# Altium PCB DAL_DPU.PcbDoc (part 3 of 3)
Units mm, origin at the board's own origin, x right, y up, seen from the top; angles counter-clockwise.
Board outline 93 x 90 mm, 4 copper layers (L1_TOP, L2_GND, L3_POWER, L4_BOT), stack 1.584 mm thick; 234 components, 146 nets, 788 pads, 889 vias.
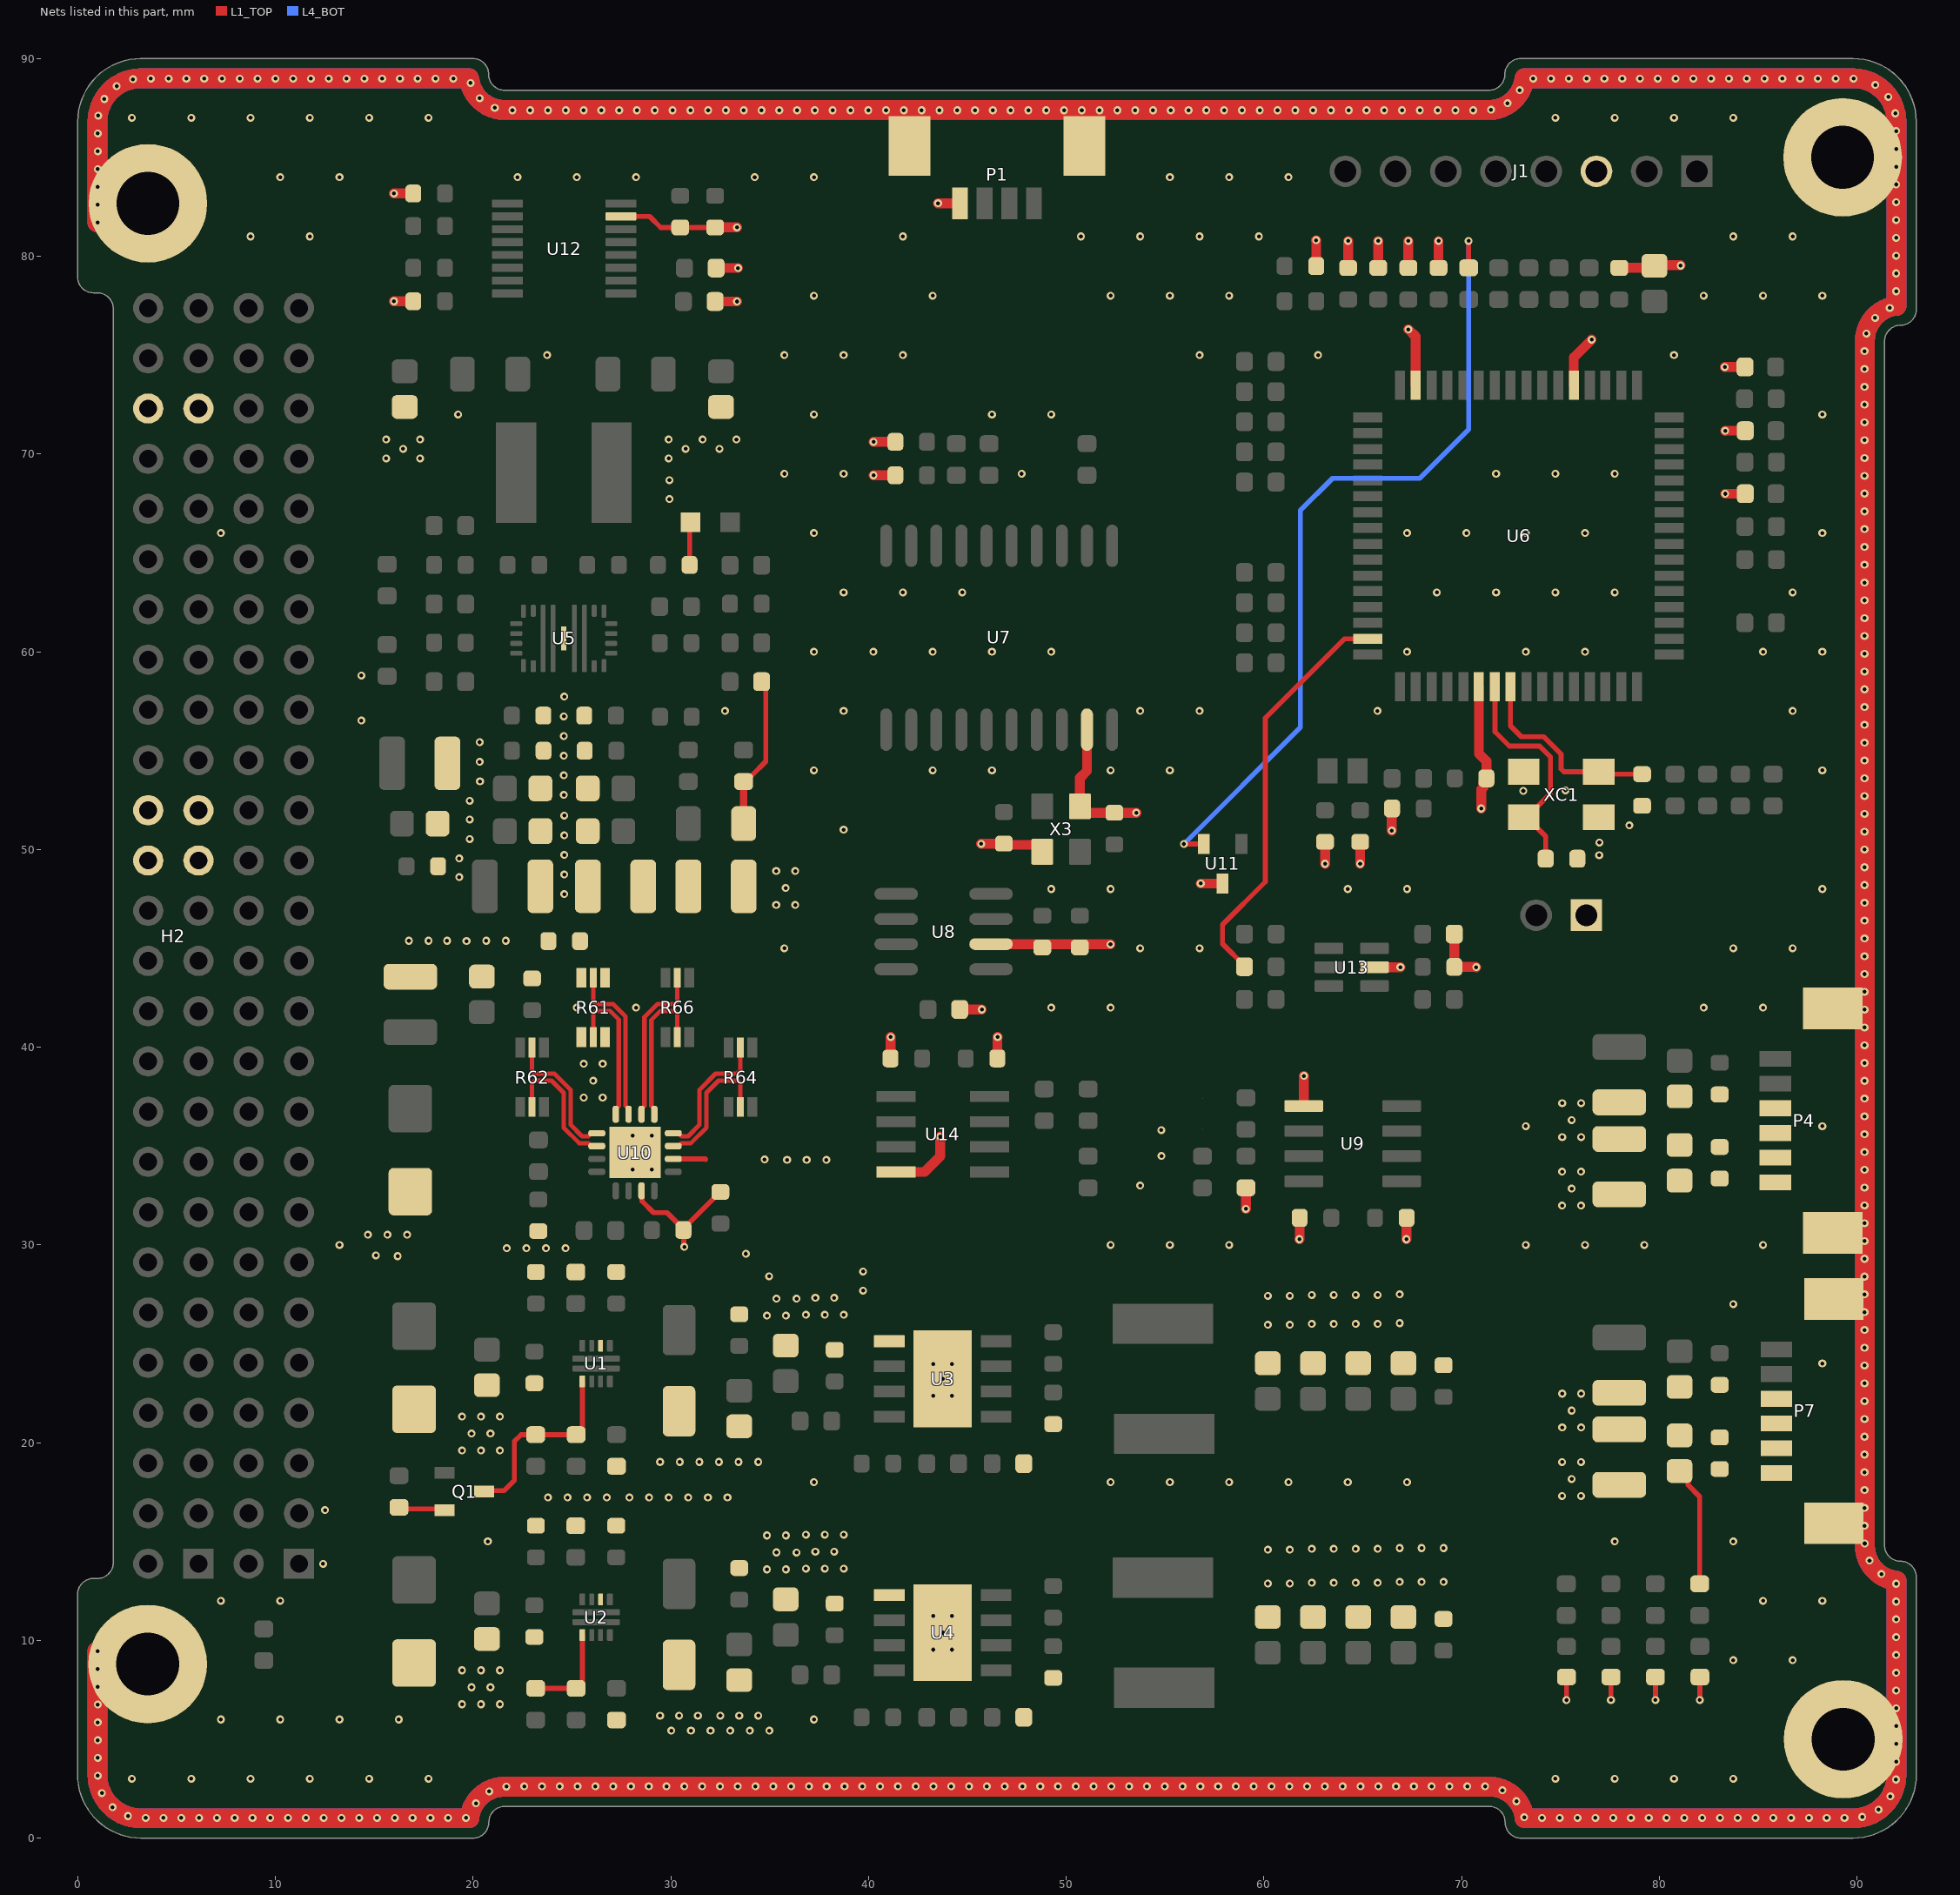
[diagram p5: the nets of this part, all layers, seen from the top]

## Via types
v1: diameter 0.4, hole 0.2, L1_TOP to L4_BOT, tented both sides, 888 vias
v2: diameter 0.4, hole 0.2, L1_TOP to L4_BOT, 1 vias

## Nets (pads, with @x,y where several pads share a name; then routed paths per layer and width w, separated by ;. In a path a pad name is that pad's centre, name@x,y a point inside that pad or via, vN(x,y) a via of type N, cw(c..) or ccw(c..) an arc to the next point about the centre after c; other vN are vias at no path point) (continued)
PGND: C1.1 C2.2 C3.1 C4.2 C5.2 C6.2 C7.2 C8.2 C9.1 C10.1 C11.1 C12.1 C15.2 C16.2 C17.2 C18.2 C19.2 C20.2 C21.2 C22.2 C23.2 C24.2 C25.2 C26.2 C27.2 C28.2 C31.2 C32.2 C33.2 C34.2 C35.1 C36.1 C38.1 C40.1 C42.1 C43.1 C44.1 C45.1 C50.1 C51.1 C52.1 C53.1 C54.1 C55.1 C56.1 C57.1 C58.2 C59.1 C60.2 C61.1 C62.2 C63.2 C64.2 C65.2 C66.1 C67.2 C68.2 C69.2 C70.2 C71.1 C72.2 C73.1 C74.1 C75.1 C76.1 C77.1 C78.2 C79.1 C80.1 C81.1 C84.1 C85.1 C86.2 C89.2 C90.1 C92.1 C93.1 C94.1 C95.1 C96.1 C97.1 C98.1 C99.1 C100.1 C101.1 C102.1 C103.1 C104.1 C105.1 C106.1 C107.1 C108.1 D1.2 D2.2 D3.2 D4.2 D7.1 D8.1 D9.1 D10.1 D11.1 D12.1 D13.1 D14.2 H2.29 H2.30 H2.31 H2.32 H2.47 H2.48 H3.1 H4.1 H5.1 H6.1 J1.3 JP1.1 NT1.1 P1.4 P1.S1 P1.S2 P4.3 P4.4 P4.S1 P4.S2 P7.3 P7.4 P7.S1 P7.S2 Q1.2 R7.2 R8.2 R9.1 R10.1 R11.2 R16.2 R17.2 R56.1 R60.2 R67.1 R68.1 R71.1 U1.8 U2.8 U3.1 U3.9 U4.1 U4.9 U5.9 U6.22 U6.53 U6.63 U7.9 U8.2 U9.5 U10.3 U10.6 U10.17 U11.3 U12.15 U13.2 U14.4 X3.2 X3.4 XC1.2 XC1.4 | length 666.5
  L1_TOP w0.254: R11.2@16.256,16.726 16.331,16.651 18.483,16.651 Q1.2@18.558,16.576 ; U12.15@27.482,82.016 28.93,82.016 29.489,81.458 C80.1@30.48,81.458 C79.1@32.243,81.458 ; U10.3@28.516,32.733 28.544,32.705 28.544,32.21 29.127,31.628 29.814,31.628 C76.1@30.645,30.797 ; U10.6@30.129,34.346 31.745,34.346 31.769,34.322 ; v1(30.683,29.896) 30.664,29.915 30.664,30.728 C76.1@30.645,30.747 C76.1@30.645,30.797 ; C36.1@30.952,64.389 30.952,66.496 NT1.1@31.004,66.548 ; C77.1@32.512,32.677 32.494,32.677 30.645,30.828 C76.1@30.645,30.797 ; C66.1@66.472,52.058 C66.1@66.485,52.07 ; v1(75.302,6.977) 75.307,6.981 75.307,8.142 D8.1@75.311,8.146 ; v1(77.555,6.981) 77.559,6.985 D9.1@77.559,8.146 ; v1(79.802,6.981) 79.807,6.985 D7.1@79.807,8.146 ; v1(82.05,6.981) 82.055,6.985 D10.1@82.055,8.146
  L1_TOP w0.5: v1(16.002,77.724) C84.1@16.98,77.724 ; v1(16.002,83.174) C81.1@16.98,83.174 ; R67.1@32.243,77.712 v1(33.348,77.712) ; C79.1@32.243,81.458 v1(33.348,81.458) ; R68.1@32.296,79.404 v1(33.401,79.404) ; v1(40.259,68.923) C68.2@41.364,68.923 ; v1(40.259,70.612) C67.2@41.364,70.612 ; C86.2@41.115,39.429 41.115,40.499 v1(41.127,40.511) ; U14.4@41.402,33.689 42.838,33.689 43.626,34.477 v1(43.626,35.474) ; v1(43.52,82.677) P1.4@44.625,82.677 ; R56.1@44.615,41.91 45.729,41.91 v1(45.733,41.906) ; v1(45.7,50.285) C69.2@46.86,50.285 ; U8.2@46.202,45.212 52.23,45.212 v1(52.243,45.199) ; C89.2@46.52,39.429 46.52,40.499 v1(46.532,40.511) ; C69.2@46.853,50.292 C69.2@46.86,50.285 ; X3.2@48.792,49.881 48.792,49.935 48.492,50.235 46.91,50.235 C69.2@46.86,50.285 ; U7.9@51.054,56.056 51.054,53.975 50.692,53.613 X3.4@50.692,52.181 50.692,52.154 50.992,51.854 C70.2@52.441,51.854 v1(53.546,51.854) ; v1(56.807,48.276) U11.3@57.912,48.276 ; v1(59.094,31.819) R60.2@59.094,32.885 ; v1(61.799,30.286) 61.811,30.298 C73.1@61.811,31.369 ; U9.5@62.018,37.025 62.018,38.541 v1(62.025,38.549) ; v1(62.645,80.81) 62.649,80.806 C78.2@62.649,79.502 ; v1(63.094,49.276) C57.1@63.094,50.381 ; C65.2@64.262,79.413 v1(64.262,80.772) ; v1(64.872,49.276) C59.1@64.872,50.381 ; U13.2@65.595,44.047 66.904,44.047 v1(66.908,44.043) ; C64.2@65.786,79.413 v1(65.786,80.772) ; v1(66.472,50.953) C66.1@66.472,52.058 ; v1(67.209,30.286) 67.221,30.298 C74.1@67.221,31.369 ; v1(67.31,76.303) 67.675,75.938 U6.63@67.675,73.477 ; C58.2@67.31,79.413 v1(67.31,80.772) ; C60.2@68.834,79.413 v1(68.834,80.772) ; R71.1@69.634,45.72 C85.1@69.634,44.057 70.726,44.057 v1(70.739,44.043) ; U6.22@70.875,58.237 70.875,54.845 71.26,54.461 C62.2@71.26,53.594 71.11,53.444 71.11,53.148 70.993,53.032 v1(70.993,52.07) ; U6.53@75.676,73.477 75.676,74.88 v1(76.579,75.782) ; C63.2@77.978,79.413 79.788,79.413 79.788,79.545 v1@81.068,79.545 ; v1(83.313,74.395) 83.316,74.398 D12.1@84.333,74.398 ; v1(83.333,67.987) 83.336,67.99 D11.1@84.353,67.99 ; v1(83.333,71.173) 83.336,71.176 D13.1@84.353,71.176
  L1_TOP w1: v1@1,3.2 ccw(c3.2,3.2) 3.2,1 4.343,1 5.243,1 6.143,1 7.043,1 7.943,1 8.843,1 9.743,1 10.643,1 11.543,1 12.443,1 13.343,1 14.243,1 15.143,1 16.043,1 16.943,1 17.843,1 18.743,1 19.811,1 cw(c21.6,0.8) v1@21.561,2.6 ; v1@1,3.213 1,4.053 1,4.953 1,5.853 1,6.753 1,7.653 1,8.553 H6.1@1,9.453 ; H3.1@1,81.709 1,82.609 1,83.509 1,84.409 1,85.309 1,86.209 1,86.8 cw(c3.2,86.8) 3.163,89 ; 3.175,89 3.702,89 4.602,89 5.502,89 6.402,89 7.302,89 8.202,89 9.102,89 10.002,89 10.902,89 11.802,89 12.702,89 13.602,89 14.502,89 15.402,89 16.302,89 17.202,89 18.102,89 19.002,89 19.8,89 ccw(c21.589,89.2) 21.561,87.4 ; v1@21.59,2.6 22.587,2.6 23.487,2.6 24.387,2.6 25.287,2.6 26.187,2.6 27.087,2.6 27.987,2.6 28.887,2.6 29.787,2.6 30.687,2.6 31.587,2.6 32.487,2.6 33.387,2.6 34.287,2.6 35.187,2.6 36.087,2.6 36.987,2.6 37.887,2.6 38.787,2.6 39.687,2.6 40.587,2.6 41.487,2.6 42.387,2.6 43.287,2.6 44.187,2.6 45.087,2.6 45.987,2.6 46.887,2.6 47.787,2.6 48.687,2.6 49.587,2.6 50.975,2.6 52.287,2.6 53.187,2.6 54.087,2.6 54.987,2.6 55.887,2.6 56.787,2.6 57.687,2.6 58.587,2.6 59.487,2.6 60.387,2.6 61.287,2.6 62.187,2.6 63.087,2.6 63.987,2.6 64.887,2.6 65.787,2.6 66.687,2.6 67.587,2.6 68.487,2.6 69.387,2.6 70.287,2.6 71.399,2.6 ; 21.59,87.399 22.89,87.399 23.79,87.399 24.69,87.399 25.59,87.399 26.49,87.399 27.39,87.399 28.29,87.399 29.19,87.399 30.09,87.399 30.99,87.399 31.89,87.4 32.79,87.4 33.69,87.4 34.59,87.4 35.49,87.4 36.39,87.4 37.29,87.4 38.19,87.4 39.09,87.4 39.99,87.4 40.89,87.4 42.015,87.4 42.69,87.4 43.59,87.4 44.49,87.4 45.39,87.4 46.29,87.4 47.19,87.4 48.09,87.4 48.99,87.4 49.89,87.4 50.79,87.4 51.69,87.4 52.59,87.4 53.49,87.4 54.39,87.4 55.29,87.4 56.19,87.4 57.09,87.4 57.99,87.4 58.89,87.4 59.79,87.4 60.69,87.4 61.59,87.4 62.49,87.4 63.39,87.4 64.29,87.4 65.19,87.4 66.09,87.4 66.99,87.4 67.89,87.4 68.79,87.4 69.69,87.4 70.59,87.4 v1@71.399,87.4 ; 71.429,2.6 cw(c71.4,0.8) 73.189,1 74.069,1 74.969,1 75.869,1 76.769,1 77.669,1 78.569,1 79.469,1 80.369,1 81.269,1 82.169,1 83.069,1 83.969,1 84.869,1 85.769,1 86.669,1 87.569,1 88.469,1 89.8,1 ccw(c89.8,3.2) 92,3.2 92,3.863 92,4.763 92,5.663 92,6.563 92,7.463 92,8.363 92,9.263 92,10.163 92,11.063 92,11.963 92,13.011 cw(c92.2,14.8) v1@90.4,14.795 ; v1@71.429,87.4 ccw(c71.389,89.2) 73.178,89 74.525,89 75.425,89 76.325,89 77.225,89 78.125,89 79.025,89 79.925,89 80.825,89 81.725,89 82.625,89 83.525,89 84.425,89 85.325,89 86.225,89 87.125,89 88.025,89 88.925,89 v1@89.789,89 ; v1@89.815,89 cw(c89.8,86.8) 92,86.806 92,85.43 92,84.53 92,83.63 92,82.73 92,81.83 92,80.93 92,80.03 92,79.13 92,78.23 92,77.496 ccw(c92.2,75.707) 90.4,75.707 ; v1@90.4,14.8 90.4,15.798 90.4,16.698 90.4,17.598 90.4,18.498 90.4,19.398 90.4,20.298 90.4,21.198 90.4,22.098 90.4,22.998 90.4,23.898 90.4,24.798 90.4,25.698 90.4,26.598 90.4,27.498 90.4,28.398 90.4,29.298 90.4,30.198 90.4,31.098 90.4,31.998 90.4,32.898 90.4,33.798 90.4,34.698 90.4,35.598 90.4,36.498 90.4,37.398 90.4,38.298 90.4,39.198 90.4,40.098 90.4,40.998 90.4,41.898 90.4,42.798 90.4,43.698 90.4,44.598 90.4,45.498 90.4,46.398 90.4,47.298 90.4,48.198 90.4,49.098 90.4,49.998 90.4,50.898 90.4,51.798 90.4,52.698 90.4,53.598 90.4,54.498 90.4,55.398 90.4,56.298 90.4,57.198 90.4,58.098 90.4,58.998 90.4,59.898 90.4,60.798 90.4,61.698 90.4,62.598 90.4,63.498 90.4,64.398 90.4,65.298 90.4,66.198 90.4,67.098 90.4,67.998 90.4,68.898 90.4,69.798 90.4,70.698 90.4,71.598 90.4,72.498 90.4,73.398 90.4,74.298 90.4,75.198 90.4,75.702
  L4_BOT w1: v1@1,3.2 ccw(c3.2,3.2) 3.2,1 4.343,1 5.243,1 6.143,1 7.043,1 7.943,1 8.843,1 9.743,1 10.643,1 11.543,1 12.443,1 13.343,1 14.243,1 15.143,1 16.043,1 16.943,1 17.843,1 18.743,1 19.811,1 cw(c21.6,0.8) v1@21.561,2.6 ; v1@1,3.213 1,4.053 1,4.953 1,5.853 1,6.753 1,7.653 1,8.553 H6.1@1,9.453 ; H3.1@1,81.709 1,82.609 1,83.509 1,84.409 1,85.309 1,86.209 1,86.8 cw(c3.2,86.8) 3.163,89 ; 3.175,89 3.702,89 4.602,89 5.502,89 6.402,89 7.302,89 8.202,89 9.102,89 10.002,89 10.902,89 11.802,89 12.702,89 13.602,89 14.502,89 15.402,89 16.302,89 17.202,89 18.102,89 19.002,89 19.8,89 ccw(c21.589,89.2) 21.561,87.4 ; v1@21.59,2.6 22.587,2.6 23.487,2.6 24.387,2.6 25.287,2.6 26.187,2.6 27.087,2.6 27.987,2.6 28.887,2.6 29.787,2.6 30.687,2.6 31.587,2.6 32.487,2.6 33.387,2.6 34.287,2.6 35.187,2.6 36.087,2.6 36.987,2.6 37.887,2.6 38.787,2.6 39.687,2.6 40.587,2.6 41.487,2.6 42.387,2.6 43.287,2.6 44.187,2.6 45.087,2.6 45.987,2.6 46.887,2.6 47.787,2.6 48.687,2.6 49.587,2.6 50.975,2.6 52.287,2.6 53.187,2.6 54.087,2.6 54.987,2.6 55.887,2.6 56.787,2.6 57.687,2.6 58.587,2.6 59.487,2.6 60.387,2.6 61.287,2.6 62.187,2.6 63.087,2.6 63.987,2.6 64.887,2.6 65.787,2.6 66.687,2.6 67.587,2.6 68.487,2.6 69.387,2.6 70.287,2.6 71.399,2.6 ; 21.59,87.399 22.89,87.399 23.79,87.399 24.69,87.399 25.59,87.399 26.49,87.399 27.39,87.399 28.29,87.399 29.19,87.399 30.09,87.399 30.99,87.4 31.89,87.4 32.79,87.4 33.69,87.4 34.59,87.4 35.49,87.4 36.39,87.4 37.29,87.4 38.19,87.4 39.09,87.4 39.99,87.4 40.89,87.4 42.015,87.4 42.69,87.4 43.59,87.4 44.49,87.4 45.39,87.4 46.29,87.4 47.19,87.4 48.09,87.4 48.99,87.4 49.89,87.4 50.79,87.4 51.69,87.4 52.59,87.4 53.49,87.4 54.39,87.4 55.29,87.4 56.19,87.4 57.09,87.4 57.99,87.4 58.89,87.4 59.79,87.4 60.69,87.4 61.59,87.4 62.49,87.4 63.39,87.4 64.29,87.4 65.19,87.4 66.09,87.4 66.99,87.4 67.89,87.4 68.79,87.4 69.69,87.4 70.59,87.4 v1@71.399,87.4 ; 71.429,2.6 cw(c71.4,0.8) 73.189,1 74.069,1 74.969,1 75.869,1 76.769,1 77.669,1 78.569,1 79.469,1 80.369,1 81.269,1 82.169,1 83.069,1 83.969,1 84.869,1 85.769,1 86.669,1 87.569,1 88.469,1 89.8,1 ccw(c89.8,3.2) 92,3.2 92,3.863 92,4.763 92,5.663 92,6.563 92,7.463 92,8.363 92,9.263 92,10.163 92,11.063 92,11.963 92,13.011 cw(c92.2,14.8) v1@90.4,14.795 ; v1@71.429,87.4 ccw(c71.389,89.2) 73.178,89 74.525,89 75.425,89 76.325,89 77.225,89 78.125,89 79.025,89 79.925,89 80.825,89 81.725,89 82.625,89 83.525,89 84.425,89 85.325,89 86.225,89 87.125,89 88.025,89 88.925,89 v1@89.789,89 ; v1@89.815,89 cw(c89.8,86.8) 92,86.806 92,85.43 92,84.53 92,83.63 92,82.73 92,81.83 92,80.93 92,80.03 92,79.13 92,78.23 92,77.496 ccw(c92.2,75.707) 90.4,75.707 ; v1@90.4,14.8 90.4,15.798 90.4,16.698 90.4,17.598 90.4,18.498 90.4,19.398 90.4,20.298 90.4,21.198 90.4,22.098 90.4,22.998 90.4,23.898 90.4,24.798 90.4,25.698 90.4,26.598 90.4,27.498 90.4,28.398 90.4,29.298 90.4,30.198 90.4,31.098 90.4,31.998 90.4,32.898 90.4,33.798 90.4,34.698 90.4,35.598 90.4,36.498 90.4,37.398 90.4,38.298 90.4,39.198 90.4,40.098 90.4,40.998 90.4,41.898 90.4,42.798 90.4,43.698 90.4,44.598 90.4,45.498 90.4,46.398 90.4,47.298 90.4,48.198 90.4,49.098 90.4,49.998 90.4,50.898 90.4,51.798 90.4,52.698 90.4,53.598 90.4,54.498 90.4,55.398 90.4,56.298 90.4,57.198 90.4,58.098 90.4,58.998 90.4,59.898 90.4,60.798 90.4,61.698 90.4,62.598 90.4,63.498 90.4,64.398 90.4,65.298 90.4,66.198 90.4,67.098 90.4,67.998 90.4,68.898 90.4,69.798 90.4,70.698 90.4,71.598 90.4,72.498 90.4,73.398 90.4,74.298 90.4,75.198 90.4,75.702
  other v1: 3.443,1.017 4.343,1.017 5.243,1.017 6.143,1.017 7.043,1.017 7.943,1.017 8.843,1.017 9.743,1.017 10.643,1.017 11.543,1.017 12.443,1.017 13.343,1.017 14.243,1.017 15.143,1.017 16.043,1.017 16.943,1.017 17.843,1.017 18.743,1.017 19.643,1.017 74.069,1.017 74.969,1.017 75.869,1.017 76.769,1.017 77.669,1.017 78.569,1.017 79.469,1.017 80.369,1.017 81.269,1.017 82.169,1.017 83.069,1.017 83.969,1.017 84.869,1.017 85.769,1.017 86.669,1.017 87.569,1.017 88.469,1.017 89.369,1.017 73.169,1.055 90.267,1.07 2.548,1.114 91.09,1.435 1.765,1.558 20.15,1.761 72.772,1.862 91.687,2.108 1.223,2.276 20.822,2.359 72.065,2.42 21.687,2.607 22.587,2.617 23.487,2.617 24.387,2.617 25.287,2.617 26.187,2.617 27.087,2.617 27.987,2.617 28.887,2.617 29.787,2.617 30.687,2.617 31.587,2.617 32.487,2.617 33.387,2.617 34.287,2.617 35.187,2.617 36.087,2.617 36.987,2.617 37.887,2.617 38.787,2.617 39.687,2.617 40.587,2.617 41.487,2.617 42.387,2.617 43.287,2.617 44.187,2.617 45.087,2.617 45.987,2.617 46.887,2.617 47.787,2.617 48.687,2.617 49.587,2.617 50.487,2.617 51.387,2.617 52.287,2.617 53.187,2.617 54.087,2.617 54.987,2.617 55.887,2.617 56.787,2.617 57.687,2.617 58.587,2.617 59.487,2.617 60.387,2.617 61.287,2.617 62.187,2.617 63.087,2.617 63.987,2.617 64.887,2.617 65.787,2.617 66.687,2.617 67.587,2.617 68.487,2.617 69.387,2.617 70.287,2.617 71.187,2.617 91.968,2.963 2.746,3 5.746,3 8.746,3 11.746,3 14.746,3 17.746,3 74.746,3 77.746,3 80.746,3 83.746,3 1.017,3.153 91.983,3.863 1.017,4.053 91.983,4.763 1.017,4.953 30.029,5.432 31.021,5.432 32.013,5.432 33.006,5.432 33.998,5.432 34.99,5.432 91.983,5.663 1.017,5.853 7.246,6 10.246,6 13.246,6 16.246,6 37.246,6 29.461,6.191 30.418,6.191 31.375,6.191 32.508,6.191 33.465,6.191 34.422,6.191 91.983,6.563 1.017,6.753 19.443,6.769 20.401,6.769 21.358,6.769 91.983,7.463 19.922,7.627 20.879,7.627 1.017,7.653 91.983,8.363 19.443,8.484 20.401,8.484 21.358,8.484 1.017,8.553 83.746,9 86.746,9 91.983,9.263 1.017,9.453 43.274,9.53 44.232,9.53 91.983,10.163 43.753,10.387 91.983,11.063 43.274,11.244 44.232,11.244 91.983,11.963 7.246,12 10.246,12 85.246,12 88.246,12 91.983,12.863 60.198,12.874 61.309,12.874 62.42,12.914 63.532,12.914 64.643,12.914 65.754,12.914 66.865,12.954 67.977,12.954 69.088,12.954 91.23,13.356 34.867,13.591 35.824,13.591 36.834,13.63 37.791,13.63 38.749,13.63 12.415,13.87 90.636,14.032 35.346,14.448 36.361,14.443 37.313,14.487 38.27,14.487 60.198,14.588 61.309,14.588 62.42,14.628 63.532,14.628 64.643,14.628 65.754,14.628 66.865,14.668 67.977,14.668 69.088,14.668 90.392,14.898 20.746,15 77.746,15 83.746,15 34.867,15.305 35.824,15.305 36.834,15.345 37.791,15.345 38.749,15.345 90.383,15.798 12.512,16.587 90.383,16.698 23.788,17.226 24.78,17.226 25.773,17.226 26.765,17.226 27.91,17.226 28.902,17.226 29.894,17.226 30.887,17.226 31.879,17.226 32.872,17.226 90.383,17.598 37.246,18 52.246,18 55.246,18 58.246,18 61.246,18 64.246,18 67.246,18 90.383,18.498 29.461,19.025 30.453,19.025 31.445,19.025 32.438,19.025 33.43,19.025 34.422,19.025 90.383,19.398 19.443,19.603 20.401,19.603 21.358,19.603 90.383,20.298 19.922,20.461 20.879,20.461 75.09,20.764 76.048,20.764 90.383,21.198 19.443,21.318 20.401,21.318 21.358,21.318 75.569,21.621 90.383,22.098 43.274,22.364 44.232,22.364 75.09,22.478 76.048,22.478 90.383,22.998 43.753,23.221 90.383,23.898 43.274,23.981 44.232,23.981 88.246,24 90.383,24.798 90.383,25.698 60.198,25.962 61.309,25.962 62.42,26.002 63.532,26.002 64.643,26.002 65.754,26.002 66.865,26.042 34.867,26.425 35.824,26.425 36.834,26.464 37.791,26.464 38.749,26.464 90.383,26.598 83.746,27 35.346,27.282 36.361,27.277 37.313,27.321 38.27,27.321 60.198,27.422 61.309,27.422 62.42,27.462 63.532,27.462 64.643,27.462 65.754,27.462 66.865,27.502 90.383,27.498 39.727,27.687 90.383,28.398 34.976,28.415 39.727,28.651 90.383,29.298 16.188,29.43 15.087,29.464 33.803,29.551 21.705,29.836 22.697,29.836 23.69,29.836 24.682,29.836 13.246,30 52.246,30 55.246,30 58.246,30 73.246,30 76.246,30 79.246,30 85.246,30 90.383,30.198 14.681,30.513 15.674,30.513 16.666,30.513 90.383,31.098 90.383,31.998 90.383,32.898 53.746,33 28.08,33.814 29.038,33.814 90.383,33.798 35.883,34.298 36.875,34.298 37.868,34.298 34.746,34.322 54.825,34.493 28.559,34.671 90.383,34.698 75.09,35.455 76.048,35.455 28.08,35.528 29.038,35.528 90.383,35.598 54.809,35.805 73.246,36 88.246,36 75.569,36.312 90.383,36.498 75.09,37.169 76.048,37.169 90.383,37.398 90.383,38.298 90.383,39.198 90.383,40.098 90.383,40.998 90.383,41.898 25.246,42 28.246,42 49.246,42 52.246,42 82.246,42 85.246,42 90.383,42.798 90.383,43.698 90.383,44.598 35.746,45 53.746,45 56.746,45 83.746,45 86.746,45 19.67,45.364 16.754,45.38 17.746,45.38 18.688,45.38 20.662,45.38 21.654,45.38 90.383,45.498 90.383,46.398 35.335,47.195 36.293,47.195 90.383,47.298 24.613,47.738 49.246,48 52.246,48 64.246,48 67.246,48 88.246,48 35.814,48.052 90.383,48.198 19.302,48.6 24.613,48.73 35.335,48.909 36.293,48.909 90.383,49.098 19.302,49.542 76.961,49.709 24.613,49.723 90.383,49.998 76.972,50.351 19.826,50.523 24.613,50.715 90.383,50.898 38.746,51 78.486,51.217 19.826,51.516 24.613,51.708 90.383,51.798 19.826,52.458 90.383,52.698 24.592,52.756 73.121,52.961 75.256,52.99 20.35,53.439 90.383,53.598 24.592,53.749 37.246,54 43.246,54 46.246,54 52.246,54 55.246,54 88.246,54 20.334,54.431 90.383,54.498 24.592,54.741 90.383,55.398 20.334,55.424 24.592,55.733 90.383,56.298 14.351,56.523 24.592,56.726 32.746,57 38.746,57 53.746,57 56.746,57 65.746,57 86.746,57 90.383,57.198 24.613,57.726 90.383,58.098 14.351,58.797 90.383,58.998 90.383,59.898 37.246,60 40.246,60 43.246,60 46.246,60 49.246,60 67.246,60 73.246,60 76.246,60 85.246,60 88.246,60 90.383,60.798 90.383,61.698 90.383,62.598 38.746,63 41.746,63 44.746,63 68.746,63 71.746,63 74.746,63 77.746,63 86.746,63 90.383,63.498 90.383,64.398 90.383,65.298 7.246,66 37.246,66 67.246,66 70.246,66 73.246,66 76.246,66 88.246,66 90.383,66.198 90.383,67.098 29.933,67.72 90.383,67.998 29.933,68.678 90.383,68.898 35.746,69 38.746,69 47.746,69 71.746,69 74.746,69 77.746,69 15.604,69.776 17.318,69.776 29.892,69.776 90.383,69.798 16.461,70.255 30.749,70.255 32.463,70.255 90.383,70.698 15.604,70.734 17.318,70.734 29.892,70.734 31.606,70.734 90.383,71.598 19.246,72 37.246,72 46.246,72 49.246,72 88.246,72 90.383,72.498 90.383,73.398 90.383,74.298 23.746,75 35.746,75 38.746,75 41.746,75 56.746,75 62.746,75 80.746,75 90.383,75.198 90.477,76.093 90.918,76.877 91.657,77.391 37.246,78 43.246,78 52.246,78 55.246,78 58.246,78 82.246,78 85.246,78 88.246,78 91.983,78.23 91.983,79.13 81.084,79.529 91.983,80.03 91.983,80.93 8.746,81 11.746,81 41.746,81 50.746,81 53.746,81 56.746,81 59.746,81 83.746,81 86.746,81 1.017,81.709 91.983,81.83 1.017,82.609 91.983,82.73 1.017,83.509 91.983,83.63 10.246,84 13.246,84 22.246,84 25.246,84 28.246,84 34.246,84 37.246,84 55.246,84 58.246,84 61.246,84 1.017,84.409 91.983,84.53 1.017,85.309 91.983,85.43 1.017,86.209 91.983,86.33 2.746,87 5.746,87 8.746,87 11.746,87 14.746,87 17.746,87 74.746,87 77.746,87 80.746,87 83.746,87 1.037,87.108 91.939,87.229 21.99,87.382 22.89,87.382 23.79,87.382 24.69,87.382 25.59,87.382 26.49,87.382 27.39,87.382 28.29,87.382 29.19,87.382 30.09,87.382 30.99,87.382 31.89,87.382 32.79,87.382 33.69,87.382 34.59,87.382 35.49,87.382 36.39,87.383 37.29,87.383 38.19,87.383 39.09,87.383 39.99,87.383 40.89,87.383 41.79,87.383 42.69,87.383 43.59,87.383 44.49,87.383 45.39,87.383 46.29,87.383 47.19,87.383 48.09,87.383 48.99,87.383 49.89,87.383 50.79,87.383 51.69,87.383 52.59,87.383 53.49,87.383 54.39,87.383 55.29,87.383 56.19,87.383 57.09,87.383 57.99,87.383 58.89,87.383 59.79,87.383 60.69,87.383 61.59,87.383 62.49,87.383 63.39,87.383 64.29,87.383 65.19,87.383 66.09,87.383 66.99,87.383 67.89,87.383 68.79,87.383 69.69,87.383 70.59,87.383 71.49,87.411 21.099,87.508 72.328,87.739 1.35,87.953 20.339,87.989 91.587,88.057 72.941,88.398 1.971,88.604 90.925,88.667 19.874,88.76 2.803,88.947 3.702,88.983 4.602,88.983 5.502,88.983 6.402,88.983 7.302,88.983 8.202,88.983 9.102,88.983 10.002,88.983 10.902,88.983 11.802,88.983 12.702,88.983 13.602,88.983 14.502,88.983 15.402,88.983 16.302,88.983 17.202,88.983 18.102,88.983 19.002,88.983 73.625,88.983 74.525,88.983 75.425,88.983 76.325,88.983 77.225,88.983 78.125,88.983 79.025,88.983 79.925,88.983 80.825,88.983 81.725,88.983 82.625,88.983 83.525,88.983 84.425,88.983 85.325,88.983 86.225,88.983 87.125,88.983 88.025,88.983 88.925,88.983 89.825,88.985
  other v2: 33.32,70.734
SENSE1_N: R61.4 U10.12 | length 7.6
  L1_TOP w0.224: R61.4@26.077,40.51 26.077,41.704 26.208,41.835 26.928,41.835 27.369,41.394 27.369,37.03 27.219,36.88 U10.12@27.219,36.606
SENSE1_P: R61.3 U10.11 | length 8.2
  L1_TOP w0.224: R61.3@26.077,43.51 26.077,42.316 26.208,42.185 27.073,42.185 27.719,41.539 27.719,37.03 27.869,36.88 U10.11@27.869,36.606
SENSE2_N: R62.4 U10.14 | length 6.9
  L1_TOP w0.224: R62.4@22.987,36.981 22.987,38.175 23.118,38.306 23.974,38.306 24.59,37.69 24.59,35.925 25.369,35.146 25.835,35.146 25.985,34.996 U10.14@26.259,34.996
SENSE2_P: R62.3 U10.13 | length 6.9
  L1_TOP w0.224: R62.3@22.987,39.981 22.987,38.787 23.118,38.656 24.119,38.656 24.94,37.835 24.94,36.07 25.514,35.496 25.835,35.496 25.985,35.646 U10.13@26.259,35.646
SENSE3_N: R64.4 U10.7 | length 7.2
  L1_TOP w0.224: U10.7@30.129,34.996 30.403,34.996 30.553,35.146 31.019,35.146 31.798,35.925 31.798,37.69 32.414,38.306 33.397,38.306 33.528,38.175 R64.4@33.528,36.797
SENSE3_P: R64.3 U10.8 | length 7.2
  L1_TOP w0.224: U10.8@30.129,35.646 30.403,35.646 30.553,35.496 30.874,35.496 31.448,36.07 31.448,37.835 32.269,38.656 33.344,38.656 33.528,38.84 R64.3@33.528,40.18
SENSE4_N: R66.4 U10.9 | length 7.6
  L1_TOP w0.224: U10.9@29.169,36.606 29.169,36.88 29.019,37.03 29.019,41.373 29.481,41.835 30.205,41.835 30.336,41.704 R66.4@30.336,40.51
SENSE4_P: R66.3 U10.10 | length 8.2
  L1_TOP w0.224: U10.10@28.519,36.606 28.519,36.88 28.669,37.03 28.669,41.518 29.336,42.185 30.205,42.185 30.336,42.316 R66.3@30.336,43.51
TEMP: R32.1 U11.2 | length 41.4
  L1_TOP w0.254: v1(55.956,50.276) U11.2@56.962,50.276 ; R32.1@70.358,79.413 v1(70.358,80.772)
  L4_BOT w0.254: v1(55.956,50.276) 61.849,56.169 61.849,67.149 63.47,68.77 67.882,68.77 70.358,71.247 v1(70.358,80.772)
TPL5010_MCU_WAKE: R73.1 U6.15 | length 20.8
  L1_TOP w0.254: R73.1@59.017,44.069 59.017,44.119 57.912,45.224 57.912,46.195 60.077,48.36 60.077,56.65 64.077,60.65 U6.15@65.262,60.65
UVLO_1: Q1.3 R1.1 R3.2 U1.1 | length 9.8
  L1_TOP w0.254: Q1.3@20.558,17.526 20.602,17.57 21.575,17.57 22.089,18.084 22.089,20.064 22.429,20.403 R1.1@23.166,20.403 R3.2@25.211,20.403 25.215,20.403 25.527,20.716 U1.1@25.527,23.099
UVLO_2: R2.1 R5.2 U2.1 | length 8
  L1_TOP w0.254: R2.1@23.166,7.569 R5.2@25.211,7.569 ; U2.1@25.525,10.271 25.525,10.22 25.527,10.218 R5.2@25.527,7.882 ; R5.2@25.211,7.569 R5.2@25.215,7.569 ; R5.2@25.211,7.569 R5.2@25.215,7.569 ; R5.2@25.211,7.569 R5.2@25.215,7.569 ; R5.2@25.211,7.569 R5.2@25.215,7.569 ; R5.2@25.211,7.569 R5.2@25.215,7.569 ; R5.2@25.211,7.569 R5.2@25.215,7.569 ; R5.2@25.211,7.569 R5.2@25.215,7.569 ; R5.2@25.211,7.569 R5.2@25.215,7.569 ; R5.2@25.215,7.569 R5.2@25.527,7.882 ; R5.2@25.215,7.569 R5.2@25.527,7.882 ; R5.2@25.215,7.569 R5.2@25.527,7.882 ; R5.2@25.215,7.569 R5.2@25.527,7.882 ; R5.2@25.215,7.569 R5.2@25.527,7.882 ; R5.2@25.215,7.569 R5.2@25.527,7.882 ; R5.2@25.215,7.569 R5.2@25.527,7.882 ; R5.2@25.215,7.569 R5.2@25.527,7.882
VOUT: C95.2 C96.2 C97.2 C106.2 C107.2 C108.2 P4.1 P4.2 P7.1 P7.2 R61.2 R81.2 | length 6.1
  L1_TOP w0.254: C107.2@81.026,18.562 81.455,18.133 81.455,17.854 82.042,17.267 R81.2@82.042,12.859
  other v1: 75.086,17.3 76.044,17.3 75.565,18.157 75.086,19.014 76.044,19.014 75.086,31.991 76.044,31.991 75.565,32.848 75.086,33.705 76.044,33.705 25.599,37.449 26.556,37.449 26.077,38.306 25.599,39.163 26.556,39.163
VOUT_SENSE: C43.2 C44.2 C45.2 R20.1 R22.2 R24.1 R61.1 | length 8.6
  L1_TOP w0.254: R24.1@33.69,53.33 33.69,53.333 34.084,53.727 34.087,53.727 34.809,54.449 34.809,58.274 R22.2@34.598,58.485
  L1_TOP w0.381: R20.1@33.69,51.308 R24.1@33.69,53.429
  L1_TOP w0.5: C44.2@30.89,48.133 C44.2@31.29,48.797
XTAL1: C56.2 U6.24 XC1.1 | length 10.1
  L1_TOP w0.254: U6.24@72.476,58.237 72.476,56.252 73.027,55.7 74.158,55.7 75.033,54.824 75.033,54.077 75.182,53.928 XC1.1@76.941,53.928 77.061,53.808 C56.2@79.13,53.808
XTAL2: C55.2 U6.23 XC1.3 | length 11.8
  L1_TOP w0.254: U6.23@71.688,58.237 71.688,55.949 72.412,55.225 73.947,55.225 74.493,54.679 74.493,52.83 73.814,52.151 XC1.3@73.291,51.628 ; XC1.3@73.141,51.628 XC1.3@73.291,51.628 ; C55.2@74.257,49.53 74.257,50.662 XC1.3@73.291,51.628
pads on no net: H1.02 H1.04 H1.05 H1.06 H1.07 H1.08 H1.09 H1.10 H1.11 H1.12 H1.13 H1.14 H1.15 H1.16 H1.17 H1.18 H1.21 H1.22 H1.23 H1.24 H1.25 H1.26 H1.27 H1.28 H1.29 H1.30 H1.31 H1.32 H1.33 H1.34 H1.35 H1.36 H1.39 H1.40 H1.41 H1.42 H1.43 H1.44 H1.46 H1.47 H1.48 H1.49 H1.50 H1.51 H1.52 H2.01 H2.02 H2.03 H2.04 H2.05 H2.06 H2.07 H2.08 H2.09 H2.10 H2.11 H2.12 H2.13 H2.14 H2.15 H2.16 H2.17 H2.18 H2.19 H2.20 H2.21 H2.22 H2.27 H2.28 H2.33 H2.34 H2.35 H2.36 H2.37 H2.38 H2.39 H2.40 H2.41 H2.42 H2.43 H2.44 H2.45 H2.46 H2.49 H2.50 H2.51 H2.52 J1.1 U1.3 U2.3 U6.4 U6.14 U6.17 U6.29 U6.31 U6.32 U6.33 U6.34 U6.36 U6.38 U6.40 U6.41 U6.42 U6.43 U6.44 U6.45 U6.46 U6.47 U6.49 U6.50 U6.58 U6.59 U6.61 U7.3 U7.4 U7.5 U7.6 U7.10 U7.11 U7.19 U7.20 U8.5 U12.7 U12.9 U14.1 U14.2 U14.3

## Polygon pours and split planes (outlines as drawn)
PGND on L1_TOP "PGND_L01_P023" (solid, remove dead copper, pour order 23): 0,3.2 0,12.33 cw(c0.8,12.33) 0.8,13.13 1,13.13 ccw(c1,13.93) 1.8,13.93 1.8,77.35 ccw(c1,77.35) 1,78.15 0.8,78.15 cw(c0.8,78.95) 0,78.95 0,86.8 cw(c3.2,86.8) 3.193,90 19.989,90 cw(c19.989,89.2) 20.789,89.2 ccw(c21.589,89.2) 21.589,88.4 71.389,88.4 ccw(c71.389,89.2) 72.189,89.2 cw(c72.989,89.2) 72.989,90 89.807,90 cw(c89.8,86.8) 93,86.807 93,77.307 cw(c92.2,77.307) 92.2,76.507 ccw(c92.2,75.707) 91.4,75.707 91.4,14.8 ccw(c92.2,14.8) 92.2,14 cw(c92.2,13.2) 93,13.2 93,3.2 cw(c89.8,3.2) 89.8,0 73,0 cw(c73,0.8) 72.2,0.8 ccw(c71.4,0.8) 71.4,1.6 21.6,1.6 ccw(c21.6,0.8) 20.8,0.8 cw(c20,0.8) 20,0 3.2,0 cw(c3.2,3.2)
+12_EPS on L1_TOP "NONET_L04_P-001" (solid, pour order 10): 18.923,38.121 18.923,36.112 cw(c18.045,36.112) 18.045,35.234 15.639,35.234 cw(c15.639,36.079) 14.794,36.079 14.794,36.69 ccw(c14.024,36.69) 14.024,37.46 1.8,37.46 1.8,42.981 13.979,42.981 cw(c13.979,42.484) 14.475,42.484 ccw(c15.05,42.484) 15.05,41.909 18.548,41.909 ccw(c18.548,42.814) 19.188,42.174 cw(c19.9,41.462) 19.9,42.469 23.989,42.469 cw(c23.989,42.062) 24.396,42.062 24.396,39.849 cw(c23.815,39.849) 23.815,39.268 20.071,39.268 ccw(c20.071,38.121)
+5_TRANS on L1_TOP "NONET_L04_P-001" (solid, pour order 9): 32.121,38.06 32.121,35.553 ccw(c32.718,35.553) 32.718,34.956 38.233,34.956 ccw(c38.233,35.435) 38.712,35.435 38.712,37.572 ccw(c38.224,37.572) 38.224,38.06
+5_SENSE on L1_TOP "NONET_L04_P-001" (solid, pour order 8): 28.245,42.469 28.245,45.962 34.382,45.962 cw(c34.382,45.444) 34.9,45.444 34.9,42.469
+12 on L1_TOP "NONET_L04_P-001" (solid, pour order 7): 23.837,37.481 19.995,37.481 ccw(c19.995,36.6) 19.114,36.6 19.114,32.204 cw(c16.795,32.204) 18.434,30.564 15.829,27.958 cw(c14.547,29.24) 14.558,27.427 ccw(c14.571,25.313) 12.978,26.703 ccw(c14.691,25.208) 12.417,25.208 12.417,16.247 ccw(c13.847,16.247) 12.836,15.236 13.215,14.857 cw(c12.861,14.503) 13.361,14.503 13.361,12.825 ccw(c14.335,12.825) 14.335,11.852 18.118,11.852 18.118,14.217 ccw(c17.625,14.217) 17.625,14.71 17.046,14.71 cw(c17.046,16.431) 15.831,15.212 15.362,15.679 cw(c16.63,16.951) 14.835,16.951 14.835,23.99 cw(c15.526,23.99) 15.526,24.681 18.495,24.681 18.495,27.105 cw(c19.407,27.105) 18.762,27.75 20.903,29.891 ccw(c19.6,31.194) 21.443,31.194 21.443,34.855 cw(c22.319,34.855) 22.319,35.731 23.837,35.731
+5_SENSE_TRANS on L1_TOP "NONET_L04_P-001" (solid, pour order 6): 31.994,38.902 31.994,41.814 cw(c32.497,41.814) 32.497,42.316 36.727,42.316 cw(c36.728,41.706) 37.338,41.706 37.338,39.554 cw(c36.686,39.554) 36.686,38.902
VOUT on L1_TOP "NONET_L04_P-001" (solid, pour order 5): 27.394,41.01 24.609,41.01 24.609,38.191 24.965,37.835 24.965,37.036 27.388,37.036 27.394,37.03
+5 on L1_TOP "NONET_L04_P-001" (solid, pour order 4): 29.019,41.01 31.756,41.01 31.756,38.143 31.448,37.835 31.448,37.036 29.025,37.036 29.019,37.03
VOUT_SENSE on L1_TOP "NONET_L04_P-001" (solid, pour order 2): 34.889,52.735 32.392,52.735 ccw(c32.392,52.177) 31.834,52.177 31.834,50.678 cw(c31.293,50.678) 31.293,50.137 27.002,50.137 27.002,46.973 cw(c26.576,46.973) 26.576,46.547 24.562,46.547 24.562,42.469 28.245,42.469 28.245,44.342 cw(c29.997,44.342) 29.998,46.094 32.866,46.094 32.866,49.3 cw(c33.29,49.3) 33.29,49.723 34.958,49.723 ccw(c34.958,50.33) 35.565,50.33 35.565,52.059 ccw(c34.889,52.059)
AGND on L1_TOP "NONET_L04_P-001" (solid, pour order 19): 26.707,61.52 cw(c26.742,61.485) 26.742,61.535 26.992,61.535 ccw(c26.992,61.778) 27.164,61.606 29.071,63.513 cw(c29.627,62.957) 29.627,63.744 31.902,63.744 ccw(c31.902,64.283) 32.239,63.861 ccw(c31.885,64.215) 32.385,64.215 32.385,66.915 ccw(c32.025,66.915) 32.279,67.17 ccw(c31.942,66.833) 31.942,67.31 31.598,67.31 cw(c31.598,67.678) 31.337,67.418 31.267,67.488 cw(c31.546,67.766) 31.152,67.766 31.152,69.213 cw(c31.416,69.217) 31.232,69.407 cw(c31.615,69.159) 31.627,69.615 33.537,69.615 cw(c33.538,69.377) 33.706,69.545 cw(c33.483,69.323) 33.798,69.322 33.798,62.323 cw(c33.285,62.323) 33.285,61.811 31.932,61.811 ccw(c31.932,61.517) 31.65,61.598 31.65,60.087 cw(c31.375,60.087) 31.569,59.893 cw(c31.309,60.153) 31.309,59.785 30.536,59.785 cw(c30.536,59.956) 30.415,59.835 cw(c30.704,60.124) 30.295,60.124 30.295,62.53 ccw(c29.807,62.53) 30.152,62.875 ccw(c29.818,62.541) 29.817,63.014 29.252,63.014 ccw(c29.252,62.666) 29.006,62.912 27.476,61.382 cw(c27.242,61.616) 27.242,61.285 26.742,61.285 cw(c26.742,61.335) 26.707,61.3 cw(c26.742,61.335) 26.692,61.335 26.692,61.485 cw(c26.742,61.485)
+5 on L1_TOP "NONET_L04_P-001" (solid, pour order 1): 17.031,55.079 17.031,47.861 cw(c15.953,47.861) 15.953,46.783 ccw(c15.953,45.259) 14.429,45.259 14.429,43.795 cw(c13.818,43.795) 13.818,43.184 1.8,43.184 1.8,48.235 11.511,48.235 ccw(c11.511,50.008) 13.284,50.008 13.284,55.013 cw(c13.977,55.013) 13.977,55.706 16.404,55.706 cw(c16.404,55.079)
+5 on L3_POWER "+5_L03_P022" (solid, remove dead copper, pour order 22): 0,3.2 0,12.33 cw(c0.8,12.33) 0.8,13.13 1,13.13 ccw(c1,13.93) 1.8,13.93 1.8,77.35 ccw(c1,77.35) 1,78.15 0.8,78.15 cw(c0.8,78.95) 0,78.95 0,86.8 cw(c3.2,86.8) 3.193,90 19.989,90 cw(c19.989,89.2) 20.789,89.2 ccw(c21.589,89.2) 21.589,88.4 71.389,88.4 ccw(c71.389,89.2) 72.189,89.2 cw(c72.989,89.2) 72.989,90 89.807,90 cw(c89.8,86.8) 93,86.807 93,77.307 cw(c92.2,77.307) 92.2,76.507 ccw(c92.2,75.707) 91.4,75.707 91.4,14.8 ccw(c92.2,14.8) 92.2,14 cw(c92.2,13.2) 93,13.2 93,3.2 cw(c89.8,3.2) 89.8,0 73,0 cw(c73,0.8) 72.2,0.8 ccw(c71.4,0.8) 71.4,1.6 21.6,1.6 ccw(c21.6,0.8) 20.8,0.8 cw(c20,0.8) 20,0 3.2,0 cw(c3.2,3.2)
+5_TRANS on L3_POWER "NONET_L04_P-001" (solid, pour order 11): 36.997,38.1 36.997,35.19 68.25,35.19 68.25,23.622 76.454,23.622 76.454,26.504 71.4,26.504 71.4,38.1 76.454,38.1 76.454,41.148 68.25,41.148 68.25,38.1
VOUT on L3_POWER "NONET_L04_P-001" (solid, pour order 15): 24.206,39.878 27.178,39.878 27.178,37.038 27.226,36.99 27.226,29.089 43.968,29.089 43.968,6.608 71.389,6.608 71.389,19.812 79.644,19.812 79.644,30.912 74.041,30.912 74.041,34.544 76.986,34.544 82.372,34.544 82.372,16.51 74.422,16.51 74.422,4.318 39.878,4.318 39.878,26.07 24.206,26.07
+5_SENSE on L3_POWER "NONET_L04_P-001" (solid, pour order 13): 35.052,46.482 35.052,41.656 34.254,41.656 34.254,32.385 47.349,32.385 47.349,9.144 69.088,9.144 69.088,6.758 43.968,6.758 43.968,29.793 31.496,29.793 31.496,46.482
+12_TRANS on L3_POWER "L3_POWER-+12_TRANS" (solid, pour order 17): 18.288,22.86 35.19,22.86 35.19,26.07 21.082,26.07 21.082,41.402 16.002,41.402 16.002,45.817 22.098,45.817 22.098,48.261 13.716,48.261 13.716,38.698 18.288,38.698 18.288,38.354
+5_SENSE_TRANS on L3_POWER "NONET_L04_P-001" (solid, pour order 12): 34.254,41.656 37.116,41.656 37.116,35.119 50.575,35.119 50.575,21.939 69.088,21.939 69.088,19.304 47.498,19.304 47.498,32.385 34.254,32.385
PGND on L2_GND "PGND_L02_P021" (solid, pour order 21): 0,3.2 0,12.33 cw(c0.8,12.33) 0.8,13.13 1,13.13 ccw(c1,13.93) 1.8,13.93 1.8,77.35 ccw(c1,77.35) 1,78.15 0.8,78.15 cw(c0.8,78.95) 0,78.95 0,86.8 cw(c3.2,86.8) 3.193,90 19.989,90 cw(c19.989,89.2) 20.789,89.2 ccw(c21.589,89.2) 21.589,88.4 71.389,88.4 ccw(c71.389,89.2) 72.189,89.2 cw(c72.989,89.2) 72.989,90 89.807,90 cw(c89.8,86.8) 93,86.807 93,77.307 cw(c92.2,77.307) 92.2,76.507 ccw(c92.2,75.707) 91.4,75.707 91.4,14.8 ccw(c92.2,14.8) 92.2,14 cw(c92.2,13.2) 93,13.2 93,3.2 cw(c89.8,3.2) 89.8,0 73,0 cw(c73,0.8) 72.2,0.8 ccw(c71.4,0.8) 71.4,1.6 21.6,1.6 ccw(c21.6,0.8) 20.8,0.8 cw(c20,0.8) 20,0 3.2,0 cw(c3.2,3.2)
AGND on L2_GND "NONET_L04_P-001" (solid, pour order 20): 13.97,67.589 13.97,64.008 33.807,64.008 33.807,69.596 31.166,69.596 31.166,67.589
PGND on L4_BOT "PGND_L04_P024" (solid, remove dead copper, pour order 24): 0,3.2 0,12.33 cw(c0.8,12.33) 0.8,13.13 1,13.13 ccw(c1,13.93) 1.8,13.93 1.8,77.35 ccw(c1,77.35) 1,78.15 0.8,78.15 cw(c0.8,78.95) 0,78.95 0,86.8 cw(c3.2,86.8) 3.193,90 19.989,90 cw(c19.989,89.2) 20.789,89.2 ccw(c21.589,89.2) 21.589,88.4 71.389,88.4 ccw(c71.389,89.2) 72.189,89.2 cw(c72.989,89.2) 72.989,90 89.807,90 cw(c89.8,86.8) 93,86.807 93,77.307 cw(c92.2,77.307) 92.2,76.507 ccw(c92.2,75.707) 91.4,75.707 91.4,14.8 ccw(c92.2,14.8) 92.2,14 cw(c92.2,13.2) 93,13.2 93,3.2 cw(c89.8,3.2) 89.8,0 73,0 cw(c73,0.8) 72.2,0.8 ccw(c71.4,0.8) 71.4,1.6 21.6,1.6 ccw(c21.6,0.8) 20.8,0.8 cw(c20,0.8) 20,0 3.2,0 cw(c3.2,3.2)

## Keep-outs
Keep-Out Layer:
  lines w0.2: 0,3.2 ccw(c3.2,3.2) 3.2,0 20,0 ccw(c20,0.8) 20.8,0.8 cw(c21.6,0.8) 21.6,1.6 71.4,1.6 cw(c71.4,0.8) 72.2,0.8 ccw(c73,0.8) 73,0 89.8,0 ccw(c89.8,3.2) 93,3.2 93,13.2 ccw(c92.2,13.2) 92.2,14 cw(c92.2,14.8) 91.4,14.8 91.4,75.707 91.4,75.707 cw(c92.2,75.707) 92.2,76.507 ccw(c92.2,77.307) 93,77.307 93,86.807 ccw(c89.8,86.8) 89.807,90 72.99,90 ; 0,3.2 0,12.33 cw(c0.8,12.33) 0.8,13.13 0.8,13.13 1,13.13 ccw(c1,13.93) 1.8,13.93 ; 0,3.2 0,3.2 ; 1,78.15 cw(c1,77.35) 1.8,77.35 1.8,13.93 ; 1,78.15 0.8,78.15 cw(c0.8,78.95) 0,78.95 0,86.8 cw(c3.2,86.8) 3.193,90 ; 1,78.15 1,78.15 ; 1.8,13.93 1.8,13.93 ; 3.193,90 19.989,90 cw(c19.989,89.2) 20.789,89.2 ccw(c21.589,89.2) 21.589,88.4 71.389,88.4 ccw(c71.389,89.2) 72.189,89.2 cw(c72.989,89.2) 72.989,90 ; 3.193,90 3.193,90 ; 72.989,90 72.99,90

## Other copper
L1_TOP:
  region net NetC14_1: 45.678,12.007 45.678,12.69 cw(c46.029,12.69) 46.029,13.041 46.538,13.041 ccw(c46.538,19.309) 47.901,13.191 52.363,14.185 57.443,14.185 57.443,12.153 47.228,12.153 47.228,12.007
  region net NetC13_1: 45.678,24.841 45.678,25.524 cw(c46.029,25.524) 46.029,25.875 46.538,25.875 ccw(c46.538,32.143) 47.901,26.025 52.363,27.019 57.443,27.019 57.443,24.987 47.228,24.987 47.228,24.841
  region net +12_MCU: 33.716,12.456 29.594,12.456 29.593,12.455 29.593,10.913 ccw(c29.802,10.913) 29.654,10.765 cw(c32.436,10.41) 32.687,10.661 32.752,10.596 cw(c32.597,10.442) 32.816,10.442 32.816,9.448 ccw(c33.091,9.448) 32.896,9.253 ccw(c33.05,9.407) 33.05,9.19 33.87,9.19 ccw(c33.87,9.436) 34.044,9.262 34.061,9.279 ccw(c33.928,9.412) 34.116,9.412 34.116,10.886 ccw(c33.805,10.886) 34.025,11.105 33.967,11.163 cw(c34.092,11.287) 33.916,11.287 33.916,12.276 ccw(c33.763,12.276) 33.871,12.383 33.857,12.397 ccw(c33.716,12.256)
  region net +12_MCU: 41.828,11.307 40.215,11.307 ccw(c40.214,10.543) 39.674,11.083 39.57,10.979 cw(c38.8,11.75) 38.8,10.66 32.888,10.66 32.888,9.863 38.737,9.863 cw(c38.737,8.763) 39.515,9.541 ccw(c40.096,10.122) 40.096,9.3 41.828,9.3
  region net +12_MCU: 26.227,11.565 27.438,11.565 ccw(c26.971,12.701) 27.905,11.904 cw(c28.943,11.205) 28.943,12.456 32.004,12.456 32.004,10.763 28.129,10.763 cw(c28.129,11.201) 27.73,11.022 ccw(c27.166,10.624) 27.421,11.265 26.227,11.265
  region net +12: 15.918,26.843 cw(c16.16,26.843) 15.989,27.015 cw(c16.16,26.844) 16.16,27.086 17.876,27.086 cw(c17.876,26.844) 18.047,27.015 19.093,25.969 ccw(c20.701,27.577) 20.701,25.303 21.622,25.303 cw(c21.622,24.747) 22.015,25.14 ccw(c22.346,25.471) 22.346,25.003 23.525,25.003 cw(c23.525,24.59) 23.817,24.882 24.549,24.15 ccw(c25.155,24.757) 25.155,23.899 27.371,23.899 cw(c27.372,23.844) 27.411,23.883 cw(c27.372,23.844) 27.427,23.844 27.427,23.655 cw(c27.372,23.654) 27.411,23.615 cw(c27.372,23.654) 27.371,23.599 24.837,23.599 cw(c24.821,24.661) 24.081,23.899 ccw(c23.363,23.203) 23.379,24.203 22.088,24.203 ccw(c22.088,24.038) 21.971,24.154 cw(c21.847,24.279) 21.847,24.103 19.471,24.103 cw(c19.471,25.178) 18.71,24.418 ccw(c18.064,23.772) 18.064,24.686 16.16,24.686 cw(c16.16,24.927) 15.989,24.756 15.972,24.773 cw(c16.102,24.904) 15.918,24.904
  region net +12_TRANS: 26.227,24.399 27.438,24.399 ccw(c26.971,25.535) 27.905,24.738 cw(c28.943,24.039) 28.943,25.29 32.004,25.29 32.004,23.597 28.129,23.597 cw(c28.129,24.035) 27.73,23.856 ccw(c27.166,23.458) 27.421,24.099 26.227,24.099
  region net +5_TRANS: 86.673,39.807 82.802,39.807 cw(c82.802,40.858) 82.059,40.115 ccw(c81.344,39.4) 81.344,40.411 80.266,40.411 cw(c80.266,41.202) 79.706,40.643 ccw(c78.793,39.73) 78.793,41.021 74.986,41.021 ccw(c74.986,40.662) 74.628,40.662 74.628,38.818 ccw(c75.034,38.818) 75.034,38.411 83.742,38.411 cw(c83.742,37.308) 84.521,38.088 84.69,37.92 ccw(c85.082,38.312) 85.082,37.757 86.673,37.757
  region net VOUT: 86.673,32.757 82.802,32.757 ccw(c82.802,31.706) 82.059,32.449 cw(c81.344,33.164) 81.344,32.153 80.266,32.153 ccw(c80.266,31.362) 79.706,31.921 cw(c78.793,32.834) 78.793,31.543 74.986,31.543 cw(c74.986,31.902) 74.628,31.902 74.628,33.746 cw(c75.034,33.746) 75.034,34.153 83.742,34.153 ccw(c83.742,35.256) 84.521,34.476 84.69,34.644 cw(c85.082,34.252) 85.082,34.807 86.673,34.807
  region net VOUT: 86.728,18.066 82.858,18.066 ccw(c82.858,17.015) 82.114,17.758 cw(c81.4,18.473) 81.399,17.462 80.321,17.462 ccw(c80.321,16.671) 79.761,17.23 cw(c78.848,18.143) 78.848,16.852 75.042,16.852 cw(c75.042,17.211) 74.683,17.211 74.683,19.055 cw(c75.09,19.055) 75.09,19.462 83.797,19.462 ccw(c83.797,20.564) 84.577,19.785 84.745,19.953 cw(c85.137,19.561) 85.137,20.116 86.728,20.116
  region net +5_TRANS: 86.728,25.116 82.858,25.116 cw(c82.858,26.167) 82.114,25.424 ccw(c81.4,24.709) 81.399,25.72 80.321,25.72 cw(c80.321,26.511) 79.761,25.952 ccw(c78.848,25.039) 78.848,26.33 75.042,26.33 ccw(c75.042,25.971) 74.683,25.971 74.683,24.127 ccw(c75.09,24.127) 75.09,23.72 83.797,23.72 cw(c83.797,22.617) 84.577,23.397 84.745,23.228 ccw(c85.137,23.621) 85.137,23.066 86.728,23.066
  region net AGND: 18.694,58.018 18.694,64.759 ccw(c18.41,64.759) 18.41,65.044 17.43,65.044 cw(c17.43,65.395) 17.079,65.395 17.079,67.327 ccw(c16.789,67.327) 16.789,67.618 14.324,67.618 ccw(c14.324,67.264) 13.97,67.264 13.97,64.007 ccw(c14.35,64.007) 14.35,63.627 16.987,63.627 cw(c16.987,63.296) 17.318,63.296 17.318,58.019 ccw(c17.58,58.019) 17.581,57.757 18.441,57.763 ccw(c18.439,58.018)
  region net +12_TRANS: 30.067,25.741 34.443,25.741 cw(c34.443,25.259) 34.925,25.259 34.925,24.152 ccw(c35.372,24.152) 35.375,23.705 36.093,23.711 36.093,22.697 32.459,22.697 cw(c32.459,23.153) 32.004,23.153 ccw(c31.56,23.153) 31.559,23.597 30.067,23.597
  region net +12_TRANS: 23.427,62.024 23.427,58.977 23.218,58.6 21.559,57.109 21.559,54.143 20.98,53.564 20.98,50.868 cw(c20.206,50.868) 20.723,50.292 20.142,49.769 ccw(c20.599,49.261) 19.916,49.261 19.916,48.153 cw(c19.612,48.153) 19.612,47.849 18.741,47.849 ccw(c18.741,47.598) 18.49,47.598 18.49,46.424 ccw(c18.687,46.424) 18.687,46.226 21.847,46.226 ccw(c21.847,46.558) 22.179,46.558 22.179,53.704 22.367,53.892 22.367,56.583 23.676,58.195 23.676,58.977 23.676,62.023
  region net +5_SENSE: 52.415,6.589 52.415,8.621 56.864,8.621 ccw(c56.864,10.909) 58.482,9.291 58.753,9.561 cw(c59.763,8.55) 59.764,9.98 69.339,9.98 cw(c69.339,9.723) 69.596,9.723 69.596,6.876 cw(c69.309,6.876) 69.309,6.589
  region net +5_SENSE_TRANS: 52.415,19.423 52.415,21.455 56.864,21.455 ccw(c56.864,23.743) 58.482,22.125 58.753,22.395 cw(c59.763,21.384) 59.764,22.814 69.339,22.814 cw(c69.339,22.557) 69.596,22.557 69.596,19.71 cw(c69.309,19.71) 69.309,19.423
  region net +5: 27.709,33.046 27.709,32.152 26.959,31.402 ccw(c27.364,30.997) 26.791,30.996 26.791,29.85 ccw(c27.023,29.85) 27.023,29.618 29.169,29.618 ccw(c29.169,29.895) 29.445,29.895 29.445,30.997 29.245,31.197 29.18,31.197 cw(c29.18,31.64) 28.866,31.326 28.029,32.163 28.029,33.046
  region net +5: 26.569,34.506 25.787,34.506 23.068,34.164 ccw(c23.1,33.906) 22.84,33.906 22.84,32.135 ccw(c23.078,32.135) 23.078,31.896 23.649,31.896 25.829,34.186 26.569,34.186
  region net +12_TRANS: 41.828,24.141 40.215,24.141 ccw(c40.214,23.377) 39.674,23.917 39.57,23.813 cw(c38.8,24.584) 38.8,23.494 32.888,23.494 32.888,22.697 38.737,22.697 cw(c38.737,21.597) 39.515,22.375 ccw(c40.096,22.956) 40.096,22.134 41.828,22.134
  region net +12: 15.918,14.009 cw(c16.16,14.009) 15.989,14.181 cw(c16.16,14.01) 16.16,14.252 17.876,14.252 cw(c17.876,14.01) 18.047,14.181 19.093,13.135 ccw(c20.701,14.743) 20.701,12.469 21.622,12.469 cw(c21.622,11.913) 22.015,12.306 ccw(c22.346,12.637) 22.346,12.169 23.525,12.169 cw(c23.525,11.756) 23.817,12.048 24.549,11.316 ccw(c25.155,11.923) 25.155,11.065 27.371,11.065 cw(c27.372,11.01) 27.411,11.049 cw(c27.372,11.01) 27.427,11.01 27.427,10.821 cw(c27.372,10.82) 27.411,10.781 cw(c27.372,10.82) 27.371,10.765 24.837,10.765 cw(c24.821,11.827) 24.081,11.065 ccw(c23.363,10.369) 23.379,11.369 22.088,11.369 ccw(c22.088,11.204) 21.971,11.32 cw(c21.847,11.445) 21.847,11.269 19.471,11.269 cw(c19.471,12.344) 18.71,11.584 ccw(c18.064,10.938) 18.064,11.852 16.16,11.852 cw(c16.16,12.093) 15.989,11.922 15.972,11.939 cw(c16.102,12.07) 15.918,12.07
  region net PGND: 26.019,46.783 ccw(c26.019,47.22) 26.457,47.22 26.457,49.343 26.399,49.401 26.399,53.578 26.045,53.932 26.045,57.123 24.717,58.97 24.717,59.485 24.467,59.485 24.467,58.96 23.165,57.149 23.165,53.957 22.811,53.603 22.811,49.427 22.753,49.369 22.753,47.309 ccw(c23.279,47.309) 23.279,46.783
  region net NetC37_1: 23.927,59.255 23.927,62.353 22.952,63.984 22.952,64.717 21.163,66.506 21.163,71.586 23.195,71.586 23.195,66.506 24.177,64.78 24.177,59.254
  region net NetC35_2: 25.757,62.024 25.757,58.977 25.967,58.6 27.625,57.109 27.625,54.143 28.204,53.564 28.204,50.927 27.006,50.927 27.006,53.704 26.817,53.892 26.817,56.519 25.508,58.195 25.508,58.977 25.508,62.023
  region net NetC41_1: 25.257,59.255 25.257,62.353 26.232,63.984 26.232,64.717 28.021,66.506 28.021,71.586 25.989,71.586 25.989,66.506 25.007,64.78 25.007,59.254
L3_POWER:
  pour cut-out: 2.032,45.72 7.366,45.72 7.366,43.144 2.032,43.144

## Silkscreen, mask and mechanical layers (free items; w line width, h text height)
Top Overlay:
  lines w0.2: 73.568,44.765 76.469,44.765
  lines w0.254: 42.698,79.02 50.272,79.02 ; 62.886,81.263 83.185,81.263 ; 42.698,77.376 50.323,77.376 50.323,80.372 42.698,80.372 42.698,77.376
  text "TMS" at 63.164,81.823 h1
  text "TDI" at 65.878,81.811 h1
  text "nRST" at 68.132,81.823 h1
  text "TCK" at 71.277,81.822 h1
  text "TDO" at 73.983,81.823 h1
  text "GND" at 76.706,81.823 h1
  text "5V" at 79.496,81.823 h1
  text "NC" at 81.442,81.822 h1
  text "CONSOLE" at 44.3,79.411 h1
  text "TX" at 45.504,77.898 h1
  text "RX" at 47.167,77.898 h1
  text "GND" at 43.063,77.889 h1
  text "+5" at 48.884,77.882 h1
  text "USER_LED" at 88.109,72.506 h1 r90
  text "TRANS_FLT" at 89.299,68.817 h1 r90
  text "MCU_FLT" at 88.063,65.896 h1 r90
  text "RESET" at 73.58,43.769 h1
  text "VOUT" at 82.427,3.32 h1 r90
  text "5V_MCU" at 77.843,2.841 h1 r90
  text "12V_EPS" at 75.658,2.748 h1 r90
  text "5V_TRANS" at 80.053,2.442 h1 r90
Bottom Overlay:
  drawing of 17 lines, arcs and shapes, not listed
  text "DAL_PDU_V1.1" at 49.57,43.575 h1
  text "Checked by: Bao Bui" at 50.662,42.122 h1
  text "Approved by: Vu Pham" at 51.163,40.852 h1
  text "Designed by: Kien Hoang" at 51.617,39.457 h1
Top Solder:
  rectangle: 26.981,32.42 29.405,36.866
  rectangle: 10.646,9.246 11.755,10.626
  rectangle: 56.343,35.88 57.453,37.26
  rectangle: 26.609,77.834 28.349,82.967
  rectangle: 20.866,77.818 22.607,82.952
  rectangle: 24.974,9.89 27.496,12.428
  rectangle: 24.966,22.712 27.489,25.25
  region: 25.967,35.882 25.967,33.451 30.395,33.451 30.395,35.882